# Altium PCB 88路激光器工程_2.PcbDoc
Units mil, origin at the board's own origin, x right, y up, seen from the top; angles counter-clockwise.
Board outline 20074.8 x 3149.61 mil, 2 copper layers (Top Layer, Bottom Layer), stack 35.433 mil thick; 161 components, 179 nets, 582 pads, 139 vias.
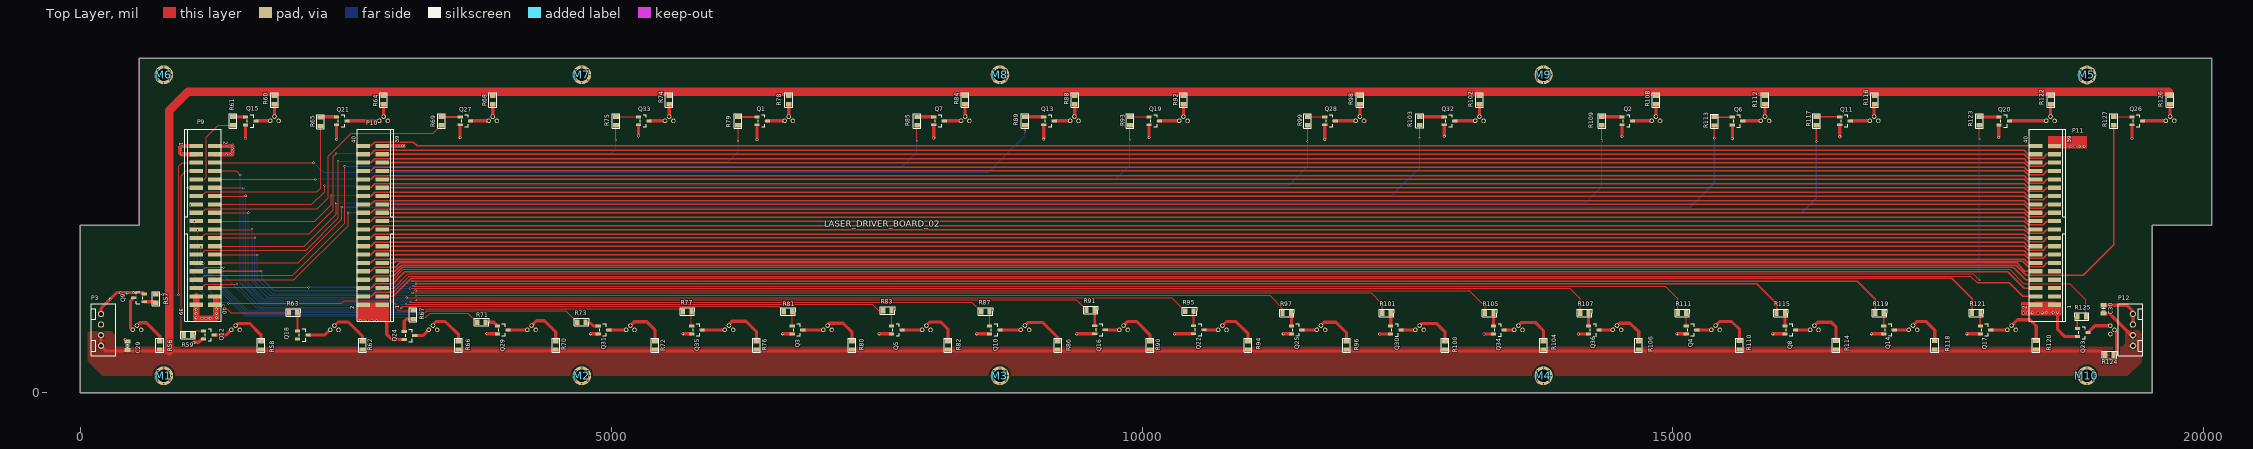
[diagram p0: Top Layer view]
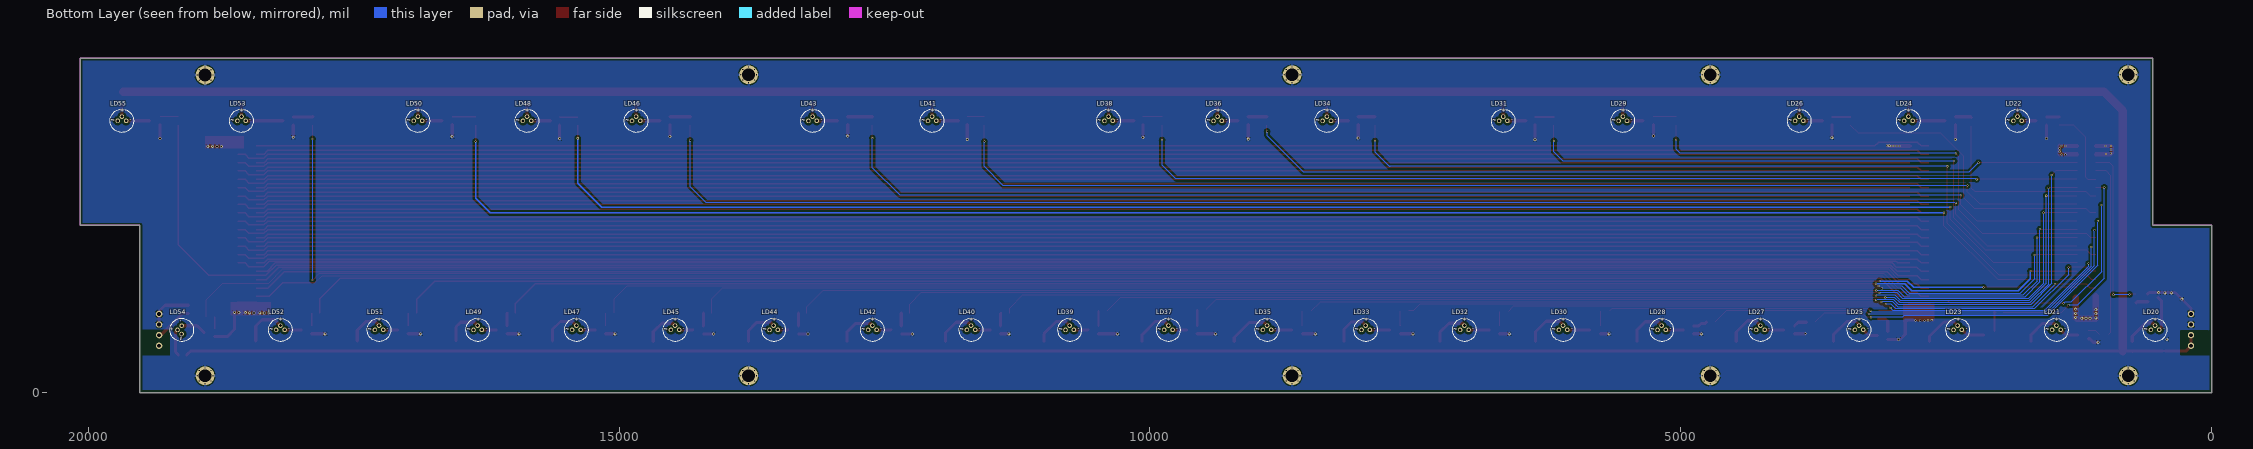
[diagram p1: Bottom Layer view, seen from below]

## Layer stack, top to bottom
Top Solder: solder mask 19.685, Solder Resist, Dk 3.5
Top Layer: signal copper 7.874
Dielectric 1: dielectric 19.685, FR-4, Dk 4.8
Bottom Layer: signal copper 7.874
Bottom Solder: solder mask 7.874, Solder Resist, Dk 3.5

## Board outline
0,0 0,1574.8 555.12,1574.8 555.12,3149.61 20074.8,3149.61 20074.8,1574.8 19511.81,1574.8 19511.81,0

## Design rules (kind name [scope] priority, off if disabled: settings)
Clearance [All] p1: gap=6 ignorepadtopadclearanceinfootprint=FALSE except(20: Arc-Poly Track-Poly SMDPad-Poly THPad-Poly Via-Poly Fill-Poly Poly-Poly)
HoleSize [All] p1: absolutevalues=TRUE maxlimit=200 minlimit=1 maxpercent=80.000 minpercent=20.000
HoleToHoleClearance [All] p1: gap=6 allowstackedmicrovias=TRUE
MinimumSolderMaskSliver [All] p1 off: minsoldermaskwidth=10
PolygonConnect [All] p1: connectstyle=Relief reliefconductorwidth=30 reliefentries=4 polygonreliefangle="90 Angle" airgapwidth=10
RoutingVias [All] p1: holewidth=28 width=50 viastyle="Through Hole" minholewidth=28 minwidth=50 maxholewidth=28 maxwidth=50
SilkToSilkClearance [All] p1 off: silktosilkclearance=10
SilkToSolderMaskClearance [IsPad] p1 off: minsilkscreentomaskgap=10 clearancetoexposedcopper=TRUE
SolderMaskExpansion [All] p1: expansion=4
Width [All] p1: maxlimit=100 minlimit=10 preferedwidth=20 minimp=50.000000 maximp=50.000000 favimp=50.000000
25 further rules are at their usual default settings.

## Components (designator, comment, footprint, x,y, rotation, side; value= is the part's Value field where it differs from the comment)
C29 "10uF/6.3V" C0805 447.83,439.96 r90 top
C30 "10uF/6.3V" C0805 19055.12,783.46 r270 top
LD20 "LD" LD_3P 535.43,590.55 r180 bottom
LD21 "LD" LD_3P 1464.57,590.55 r180 bottom
LD22 "LD" LD_3P 1830.71,2559.06 r180 bottom
LD23 "LD" LD_3P 2393.7,590.55 r180 bottom
LD24 "LD" LD_3P 2858.27,2559.06 r180 bottom
LD25 "LD" LD_3P 3322.83,590.55 r180 bottom
LD26 "LD" LD_3P 3885.83,2559.06 r180 bottom
LD27 "LD" LD_3P 4251.97,590.55 r180 bottom
LD28 "LD" LD_3P 5181.1,590.55 r180 bottom
LD29 "LD" LD_3P 5547.24,2559.06 r180 bottom
LD30 "LD" LD_3P 6110.24,590.55 r180 bottom
LD31 "LD" LD_3P 6673.23,2559.06 r180 bottom
LD32 "LD" LD_3P 7039.37,590.55 r180 bottom
LD33 "LD" LD_3P 7968.5,590.55 r180 bottom
LD34 "LD" LD_3P 8334.65,2559.06 r180 bottom
LD35 "LD" LD_3P 8897.64,590.55 r180 bottom
LD36 "LD" LD_3P 9362.2,2559.06 r180 bottom
LD37 "LD" LD_3P 9826.77,590.55 r180 bottom
LD38 "LD" LD_3P 10389.76,2559.06 r180 bottom
LD39 "LD" LD_3P 10755.91,590.55 r180 bottom
LD40 "LD" LD_3P 11685.04,590.55 r180 bottom
LD41 "LD" LD_3P 12051.18,2559.06 r180 bottom
LD42 "LD" LD_3P 12614.17,590.55 r180 bottom
LD43 "LD" LD_3P 13177.17,2559.06 r180 bottom
LD44 "LD" LD_3P 13543.31,590.55 r180 bottom
LD45 "LD" LD_3P 14472.44,590.55 r180 bottom
LD46 "LD" LD_3P 14838.58,2559.06 r180 bottom
LD47 "LD" LD_3P 15401.57,590.55 r180 bottom
LD48 "LD" LD_3P 15866.14,2559.06 r180 bottom
LD49 "LD" LD_3P 16330.71,590.55 r180 bottom
LD50 "LD" LD_3P 16893.7,2559.06 r180 bottom
LD51 "LD" LD_3P 17259.84,590.55 r180 bottom
LD52 "LD" LD_3P 18188.98,590.55 r180 bottom
LD53 "LD" LD_3P 18555.12,2559.06 r180 bottom
LD54 "LD" LD_3P 19118.11,590.55 r90 bottom
LD55 "LD" LD_3P 19681.1,2559.06 r180 bottom
M1 "HOLE-8STARS" HOLE_3MM 787.4,157.48 r0 top
M2 "HOLE-8STARS" HOLE_3MM 4724.41,157.48 r0 top
M3 "HOLE-8STARS" HOLE_3MM 8661.42,157.48 r0 top
M4 "HOLE-8STARS" HOLE_3MM 13779.53,157.48 r0 top
M5 "HOLE-8STARS" HOLE_3MM 18897.64,2990.79 r0 top
M6 "HOLE-8STARS" HOLE_3MM 787.4,2992.13 r0 top
M7 "HOLE-8STARS" HOLE_3MM 4724.41,2992.13 r0 top
M8 "HOLE-8STARS" HOLE_3MM 8661.42,2992.13 r0 top
M9 "HOLE-8STARS" HOLE_3MM 13779.53,2992.13 r0 top
M10 "HOLE-8STARS" HOLE_3MM 18897.64,157.48 r0 top
P3 "Header 4" XH2.54MM_4P_立式 196.85,590.55 r270 top
P9 "Header 20X2" JATG_2.0MM_2X20P_SMD 1181.1,1574.8 r270 top locked
P10 "Header 20X2" JATG_2.0MM_2X20P_SMD 2755.91,1574.8 r90 top locked
P11 "Header 20X2" JATG_2.0MM_2X20P_SMD 18503.94,1574.8 r90 top locked
P12 "Header 4" XH2.54MM_4P_立式 19330.71,590.55 r90 top
Q1 "NMOS" SOT23-3 6423.23,2559.06 r180 top
Q2 "NMOS" SOT23-3 14568.9,2559.06 r180 top
Q3 "NMOS" SOT23-3 6755,590.55 r180 top
Q4 "NMOS" SOT23-3 15174.21,590.55 r180 top
Q5 "NMOS" SOT23-3 7690,590.55 r180 top
Q6 "NMOS" SOT23-3 15608.27,2558.07 r180 top
Q7 "NMOS" SOT23-3 8088.58,2559.06 r180 top
Q8 "NMOS" SOT23-3 16103.35,590.55 r180 top
Q9 "NMOS" SOT23-3 555.12,892.7 r0 top
Q10 "NMOS" SOT23-3 8614.13,590.55 r180 top
Q11 "NMOS" SOT23-3 16620.08,2559.06 r180 top
Q12 "NMOS" SOT23-3 1211.61,543.31 r180 top
Q13 "NMOS" SOT23-3 9124.02,2559.06 r180 top
Q14 "NMOS" SOT23-3 17033.46,590.55 r180 top
Q15 "NMOS" SOT23-3 1607.28,2558.07 r180 top
Q16 "NMOS" SOT23-3 9604.33,591.54 r180 top
Q17 "NMOS" SOT23-3 17943.9,590.55 r180 top
Q18 "NMOS" SOT23-3 2097.44,542.32 r180 top
Q19 "NMOS" SOT23-3 10116.14,2559.06 r180 top
Q20 "NMOS" SOT23-3 18120.08,2558.07 r180 top
Q21 "NMOS" SOT23-3 2464.57,2559.06 r180 top
Q22 "NMOS" SOT23-3 10534.45,591.54 r180 top
Q23 "NMOS" SOT23-3 18858.27,563.98 r180 top
Q24 "NMOS" SOT23-3 3101.38,537.4 r180 top
Q25 "NMOS" SOT23-3 11455.71,590.55 r180 top
Q26 "NMOS" SOT23-3 19371.06,2559.06 r180 top
Q27 "NMOS" SOT23-3 3627.95,2559.06 r180 top
Q28 "NMOS" SOT23-3 11769.69,2559.06 r180 top
Q29 "NMOS" SOT23-3 3979.33,590.55 r180 top
Q30 "NMOS" SOT23-3 12388.78,589.57 r180 top
Q31 "NMOS" SOT23-3 4928.15,590.55 r180 top
Q32 "NMOS" SOT23-3 12895.67,2559.06 r180 top
Q33 "NMOS" SOT23-3 5308.07,2559.06 r180 top
Q34 "NMOS" SOT23-3 13359.25,589.57 r180 top
Q35 "NMOS" SOT23-3 5808.07,590.55 r180 top
Q36 "NMOS" SOT23-3 14253.94,589.57 r180 top
R56 "200R" R0805 750,443.9 r270 top
R57 "2k" R0805 712.6,884.84 r90 top
R58 "200R" R0805 1702.76,443.9 r270 top
R59 "2k" R0805 1015.75,543.31 r180 top
R60 "200R" R0805 1829.72,2754.92 r90 top
R61 "2k" R0805 1438.98,2557.09 r270 top
R62 "200R" R0805 2660.43,443.9 r270 top
R63 "2k" R0805 2005.91,753.94 r180 top
R64 "200R" R0805 2858.27,2754.92 r90 top
R65 "2k" R0805 2265,2550 r270 top
R66 "200R" R0805 3563.98,443.9 r270 top
R67 "2k" R0805 3136.81,732.28 r90 top
R68 "200R" R0805 3885.83,2754.92 r90 top
R69 "2k" R0805 3404.53,2557.09 r270 top
R70 "200R" R0805 4479.33,443.9 r270 top
R71 "2k" R0805 3778.54,662.4 r180 top
R72 "200R" R0805 5412.4,443.9 r270 top
R73 "2k" R0805 4720.34,662.4 r180 top
R74 "200R" R0805 5547.24,2754.92 r90 top
R75 "2k" R0805 5045.28,2557.09 r270 top
R76 "200R" R0805 6368.11,443.9 r270 top
R77 "2k" R0805 5716.54,763.78 r180 top
R78 "200R" R0805 6673.23,2754.92 r90 top
R79 "2k" R0805 6195.87,2557.09 r270 top
R80 "200R" R0805 7269.69,443.9 r270 top
R81 "2k" R0805 6666.34,761.81 r180 top
R82 "200R" R0805 8173.23,443.9 r270 top
R83 "2k" R0805 7602.36,771.65 r180 top
R84 "200R" R0805 8333.66,2754.92 r90 top
R85 "2k" R0805 7882.87,2556.1 r270 top
R86 "200R" R0805 9206.69,443.9 r270 top
R87 "2k" R0805 8525.59,763.78 r180 top
R88 "200R" R0805 9367.13,2754.92 r90 top
R89 "2k" R0805 8898.62,2556.1 r270 top
R90 "200R" R0805 10073.82,443.9 r270 top
R91 "2k" R0805 9515.75,778.54 r180 top
R92 "200R" R0805 10389.76,2754.92 r90 top
R93 "2k" R0805 9885.83,2557.09 r270 top
R94 "200R" R0805 10999.02,443.9 r270 top
R95 "2k" R0805 10445.87,765.75 r180 top
R96 "200R" R0805 11925.2,443.9 r270 top
R97 "2k" R0805 11362.2,748.03 r180 top
R98 "200R" R0805 12052.17,2754.92 r90 top
R99 "2k" R0805 11560.04,2557.09 r270 top
R100 "200R" R0805 12854.33,443.9 r270 top
R101 "2k" R0805 12302.17,748.03 r180 top
R102 "200R" R0805 13177.17,2754.92 r90 top
R103 "2k" R0805 12615.16,2558.07 r270 top
R104 "200R" R0805 13779.53,443.9 r270 top
R105 "2k" R0805 13270.67,748.03 r180 top
R106 "200R" R0805 14677.17,443.9 r270 top
R107 "2k" R0805 14165.35,748.03 r180 top
R108 "200R" R0805 14840.55,2754.92 r90 top
R109 "2k" R0805 14329.72,2557.09 r270 top
R110 "200R" R0805 15626.97,445.87 r270 top
R111 "2k" R0805 15085.63,748.03 r180 top
R112 "200R" R0805 15865.16,2754.92 r90 top
R113 "2k" R0805 15389.76,2555.12 r270 top
R114 "200R" R0805 16535,445.87 r270 top
R115 "2k" R0805 16014.76,748.03 r180 top
R116 "200R" R0805 16899.61,2754.92 r90 top
R117 "2k" R0805 16350.39,2557.09 r270 top
R118 "200R" R0805 17465,445.87 r270 top
R119 "2k" R0805 16944.88,748.03 r180 top
R120 "200R" R0805 18420,445.87 r270 top
R121 "2k" R0805 17855.31,748.03 r180 top
R122 "200R" R0805 18559.06,2754.92 r90 top
R123 "2k" R0805 17884.84,2557.09 r270 top
R124 "200R" R0805 19110,355 r180 top
R125 "2k" R0805 18848.43,715.55 r0 top
R126 "200R" R0805 19681.1,2754.92 r90 top
R127 "2k" R0805 19150.59,2557.09 r270 top

## Footprints (in the part's own frame and the unit in brackets; to place one, negate y for a bottom-side part, rotate by r counter-clockwise, add the part's x,y. Pads: shape width x height; smd on the part's side, far side on the other; paste and mask are expansions set on the pad)
C0805 [mm]
  rect 1x1.4 smd: 1(-1.003,0) 2(1.003,0)
  silkscreen extent -0.43,-0.43 0.43,0.45, body extent -1.21,-0.62 1.14,0.67, height 0.5
HOLE_3MM [mm]
  round 0.5 hole 0.3: 1(0,1.9) 2(-1.4,1.25) 3(-1.9,0) 4(-1.4,-1.25) 5(0,-1.9) 6(1.4,-1.25) 7(1.9,0) 8(1.4,1.25)
  round 4.5 hole 3.05: 9(0,0)
JATG_2.0MM_2X20P_SMD [mm]
  rect 1x3.2 smd: 1(-19,-2.25) 2(-19,2.25) 3(-17,-2.25) 4(-17,2.25) 5(-15,-2.25) 6(-15,2.25) 7(-13,-2.25) 8(-13,2.25) 9(-11,-2.25) 10(-11,2.25) 11(-9,-2.25) 12(-9,2.25) 13(-7,-2.25) 14(-7,2.25) 15(-5,-2.25) 16(-5,2.25) 17(-3,-2.25) 18(-3,2.25) 19(-1,-2.25) 20(-1,2.25) 21(1,-2.25) 22(1,2.25) 23(3,-2.25) 24(3,2.25) 25(5,-2.25) 26(5,2.25) 27(7,-2.25) 28(7,2.25) 29(9,-2.25) 30(9,2.25) 31(11,-2.25) 32(11,2.25) 33(13,-2.25) 34(13,2.25) 35(15,-2.25) 36(15,2.25) 37(17,-2.25) 38(17,2.25) 39(19,-2.25) 40(19,2.25)
  silkscreen extent -23,-5 23,3.75, body extent -22.99,-4.25 23,3.8, height 6.9
LD_3P [mm]
  round 1.1 hole 0.7: 1(0,1) ""(-1,0)
  round 1.1 hole 0.6: 2(1,0)
  silkscreen extent -2.81,-2.8 2.79,2.8, body extent -3,-3 3,3, height 5
R0805 [mm]
  rect 1x1.4 smd: 1(-1.003,0) 2(1.003,0)
  silkscreen extent -1.71,-0.9 1.69,0.9, body extent -1.21,-0.62 1.14,0.67, height 0.5
SOT23-3 [mm]
  rect 1.25x0.7 smd: 1(1.25,-0.95) 2(1.25,0.95) 3(-1.25,0)
  silkscreen extent -0.65,-1.46 0.9,1.46
XH2.54MM_4P_立式 [mil]
  round 60 hole 35.43: 1(-150,0) 2(-50,0) 3(50,0) 4(150,0)
  silkscreen extent -246,-91 246,138, body extent -246,-91 246,138, height 272

## Part data
C29 C30: library part C
P3 P12: "Header, 4-Pin", LatestRevisionDate=17-Jul-2002, LatestRevisionNote="Re-released for DXP Platform.", Publisher="Altium Limited"
P9 P10 P11: "Header, 20-Pin, Dual row", LatestRevisionDate=17-Jul-2002, LatestRevisionNote="Re-released for DXP Platform.", Publisher="Altium Limited"
R56 R57 R58 R59 R60 R61 R62 R63 R64 R65 R66 R67 R68 R69 R70 R71 R72 R73 R74 R75 R76 R77 R78 R79 R80 R81 R82 R83 R84 R85 R86 R87 R88 R89 R90 R91 R92 R93 R94 R95 R96 R97 R98 R99 R100 R101 R102 R103 R104 R105 R106 R107 R108 R109 R110 R111 R112 R113 R114 R115 R116 R117 R118 R119 R120 R121 R122 R123 R124 R125 R126 R127: library part Res2, "Resistor", LatestRevisionDate=17-Jul-2002, LatestRevisionNote="Re-released for DXP Platform.", PackageDescription="Axial Device, Thru-Hole; 2 Leads; 0.4 in Pin Spacing", PackageReference=AXIAL-0.4, Published=8-Jun-2000, Publisher="Altium Limited"

## Via types
v1: diameter 19.68, hole 11.81, Top Layer to Bottom Layer, tented both sides, 81 vias
v2: diameter 27.56, hole 15.75, Top Layer to Bottom Layer, tented both sides, 58 vias

## Nets (pads, with @x,y where several pads share a name; then routed paths per layer and width w, separated by ;. In a path a pad name is that pad's centre, name@x,y a point inside that pad or via, vN(x,y) a via of type N, cw(c..) or ccw(c..) an arc to the next point about the centre after c; other vN are vias at no path point)
GND: C29.2 C30.1 M1.1 M1.2 M1.3 M1.4 M1.5 M1.6 M1.7 M1.8 M1.9 M2.1 M2.2 M2.3 M2.4 M2.5 M2.6 M2.7 M2.8 M2.9 M3.1 M3.2 M3.3 M3.4 M3.5 M3.6 M3.7 M3.8 M3.9 M4.1 M4.2 M4.3 M4.4 M4.5 M4.6 M4.7 M4.8 M4.9 M5.1 M5.2 M5.3 M5.4 M5.5 M5.6 M5.7 M5.8 M5.9 M6.1 M6.2 M6.3 M6.4 M6.5 M6.6 M6.7 M6.8 M6.9 M7.1 M7.2 M7.3 M7.4 M7.5 M7.6 M7.7 M7.8 M7.9 M8.1 M8.2 M8.3 M8.4 M8.5 M8.6 M8.7 M8.8 M8.9 M9.1 M9.2 M9.3 M9.4 M9.5 M9.6 M9.7 M9.8 M9.9 M10.1 M10.2 M10.3 M10.4 M10.5 M10.6 M10.7 M10.8 M10.9 P3.1 P3.2 P9.1 P9.2 P9.3 P9.4 P9.37 P9.38 P9.39 P9.40 P10.1 P10.2 P10.39 P11.1 P11.2 P11.39 P12.3 P12.4 Q1.2 Q2.2 Q3.2 Q4.2 Q5.2 Q6.2 Q7.2 Q8.2 Q9.2 Q10.2 Q11.2 Q12.2 Q13.2 Q14.2 Q15.2 Q16.2 Q17.2 Q19.2 Q20.2 Q21.2 Q22.2 Q23.2 Q24.2 Q25.2 Q26.2 Q27.2 Q28.2 Q29.2 Q30.2 Q31.2 Q32.2 Q33.2 Q34.2 Q35.2 Q36.2 | length 7513.3
  Top Layer w30: P3.1 196.85,792.32 346.43,941.9 592.52,941.9 Q9.2 ; v2@1067.91,473.43 1116.14,473.43 1148.62,505.91 Q12.2 ; v2(1558.08,2392.73) Q15.2 ; v2(2415.37,2382.86) Q21.2 ; 2886.81,725.39 2886.81,670.28 2886.81,548.23 2935.04,500 Q24.2 ; v2(3578.75,2399.59) Q27.2 ; v1@3829.72,553.15 Q29.2 ; v2(4808.07,553.15) Q31.2 ; v2(5258.87,2416.35) Q33.2 ; v2(5676.18,553.15) Q35.2 ; v2(6374.02,2380.91) Q1.2 ; v2(6616.14,553.15) Q3.2 ; v2(7523.62,553.15) Q5.2 ; v2(8039.38,2396.67) Q7.2 ; v2(8442.91,553.15) Q10.2 ; v2(9074.82,2386.82) Q13.2 ; v2(9382.88,553.15) 9383.86,554.14 Q16.2 ; v2(10066.94,2402.55) Q19.2 ; v2(10305.12,553.15) 10484.26,553.15 Q22.2 ; v2(11328.74,553.15) Q25.2 ; v2(11720.49,2382.89) Q28.2 ; v2(12237.2,551.18) 12238.19,552.17 Q30.2 ; v2(12846.47,2414.38) Q32.2 ; v2(13220.47,552.17) Q34.2 ; v2(14108.27,552.17) Q36.2 ; v2@14519.7,2410.45 Q2.2 ; v2(15036.42,553.15) Q4.2 ; Q6.2 v2(15559.07,2391.72) v2@15560.04,2390.75 ; v2(15939.96,553.15) Q8.2 ; v2@16570.88,2409.46 Q11.2 ; v2(16868.11,553.15) Q14.2 ; v2(17766.73,553.15) Q17.2 ; v2(18067.91,2404.53) 18067.91,2517.71 Q20.2 ; v2(18621.06,754.92) 18621.06,595.47 18689.96,526.58 Q23.2 ; C30.1 19275.46,822.96 19330.71,767.72 P12.4 P12.3 ; v2(19321.86,2392.7) Q26.2
  Top Layer w40: P9.3 953.74,2244.09 940.94,2256.89 940.94,2312.99 v1(950.79,2322.83) P9.1 ; P9.4 1433.07,2244.09 1435.04,2246.06 1435.04,2323.82 1434.06,2322.83 P9.2 ; P10.2 P10.1 2844.49,712.6 2886.81,670.28 ; P10.39 3051.18,2322.83
  Top Layer w60: P9.37 P9.39 1092.52,693.9 1271.65,693.9 1280.51,702.76 P9.38@1280.51,891.73 ; P11.2 P11.1
  other v1: 3828.74,556.1 2791.34,678.59 2747.05,679.13 2706.69,680.12 2673.23,681.1 2637.8,682.09 1378.94,2240.16 1414.37,2240.16 998.03,2246.06 951.77,2252.95 1433.07,2268.7 949.8,2288.39 1433.07,2298.23 1414.37,2320.87 1001.97,2322.83 1378.94,2322.83 2942.91,2322.83 2968.5,2322.83 2992.13,2322.83 3016.73,2322.83 3038.39,2323.82 3061.02,2324.8
  other v2: 1070.87,473.43 2950.79,500 424.21,500.98 1147.64,699.8 1185.04,699.8 1224.41,699.8 1092.52,703.74 1282.48,708.66 1092.52,743.11 1282.48,746.06 18300.2,749.02 18341.54,750 18437.01,750 18381.89,750.98 18478.35,750.98 18518.7,751.97 18579.72,753.94 1092.52,780.51 1282.48,785.43 283.46,879.92 381.89,938.98 442.91,938.98 501.97,940.94 18745.08,2316.93 18786.42,2317.91 18826.77,2318.9 18872.05,2318.9 16570.87,2409.45 14521.65,2411.42
LD20: P9.5 R57.2 | length 1604
  Top Layer w10: R57.2 v1(775.46,924.34) ; v1(927.17,921.26) 928.15,922.24 928.15,2129.92 963.58,2165.35 P9.5
  Bottom Layer w10: v1(775.46,924.34) 778.54,921.26 v1(927.17,921.26)
LD21: P9.7 R59.2 | length 1669
  Top Layer w10: R59.2 951.56,567.99 951.56,2043.1 995.08,2086.61 P9.7
LD22: P9.9 R61.2 | length 780.6
  Top Layer w10: P9.9 1096.46,2003.94 1164.37,2003.94 1188.98,2028.54 1188.98,2403.72 1302.85,2517.59 R61.2
LD23: P9.11 R63.2 | length 2019.5
  Top Layer w10: v1(1013.78,1931.1) 1015.75,1929.13 P9.11 ; v1(1349.48,822.77) 1418.31,753.94 R63.2@1964.57,753.94
  Bottom Layer w10: v1(1013.78,1931.1) 1013.78,1074.8 1265.81,822.77 v1(1349.48,822.77)
LD24: P9.13 R65.2 | length 1788.9
  Top Layer w10: P9.13 1142.72,1850.39 1181.1,1888.78 2228.78,1888.78 2265,1925 R65.2
LD25: P9.15 R67.2 | length 2915.4
  Top Layer w10: v1@1396.65,840.55 2462.6,840.55 2486.22,864.17 2936.02,864.17 2975.39,824.8 2975.39,795.41 2999.02,771.78 R67.2
  Bottom Layer w10: v1(1039.37,1766.73) 1039.37,1139.76 1330.71,848.43 1387.8,848.43 v1(1397.64,838.58)
LD26: P9.17 R69.2 | length 2883.1
  Top Layer w10: P9.17 1144.68,1692.91 1183.07,1731.3 2234.25,1731.3 2338.58,1835.63 2338.58,2227.36 2551.05,2439.83 3326.77,2439.83 R69.2
LD27: P9.19 R71.2 | length 3334.2
  Top Layer w10: v1(3209.65,709.65) 3255.91,709.65 3295.28,749.02 3652.43,749.02 R71.2
  Bottom Layer w10: v1(1073.82,1614.17) 1073.82,1200.79 1551.43,723.17 2900.59,723.17 2914.12,709.65 v1(3209.65,709.65)
LD28: P9.21 R73.2 | length 4156.1
  Top Layer w10: v1(3230.32,739.17) 3262.17,771.02 4572.22,771.02 R73.2
  Bottom Layer w10: v1(1106.3,1529.53) 1106.3,1194.88 1562.01,739.17 v1(3230.32,739.17)
LD29: P9.23 R75.2 | length 4818.2
  Top Layer w10: P9.23 1139.76,1456.69 1177.17,1494.09 2155.51,1494.09 2384.84,1723.43 2384.84,2225.39 v1(2410.43,2250.98) ; v1(5045.28,2377.95) R75.2
  Bottom Layer w10: v1(2410.43,2250.98) 2412.4,2252.95 5005.91,2252.95 5045.28,2292.32 v1(5045.28,2377.95)
LD30: P9.25 R77.2 | length 4928.7
  Top Layer w10: v1(3216.54,769.68) 3237.87,791.02 5649.79,791.02 R77.2
  Bottom Layer w10: v1(1135.83,1370.08) 1135.83,1187.98 1568.64,755.17 3202.02,755.17 v1(3216.54,769.68)
LD31: P9.27 R79.2 | length 6076.8
  Top Layer w10: P9.27 1137.8,1299.21 1179.13,1340.55 2127.95,1340.55 2433.24,1645.84 2433.24,2174.04 v1(2428.15,2179.13) ; v1(6195.87,2370.08) R79.2
  Bottom Layer w10: v1(2428.15,2179.13) 2430.12,2177.17 6107.28,2177.17 6195.87,2265.75 v1(6195.87,2370.08)
LD32: P9.29 R81.2 | length 5701
  Top Layer w10: v1(3024.61,795.28) 3040.35,811.02 3219.17,811.02 3219.17,811.19 3219.34,811.02 6577.63,811.02 R81.2
  Bottom Layer w10: v1(1160.43,1214.57) 1160.43,1190.94 1580.2,771.17 3000.5,771.17 v1(3024.61,795.28)
LD33: P9.31 R83.2 | length 6735.5
  Top Layer w10: P9.31 1139.76,1141.73 1177.17,1179.13 v1(1351.38,1179.13) ; v1(3068.9,832.68) 3069.84,831.73 3100.41,831.73 3101.25,830.89 3118.52,830.89 3119.36,831.73 7461.61,831.73 7521.69,771.65 R83.2
  Bottom Layer w10: v1(1351.38,1179.13) 1349.48,1177.23 1349.48,1111.15 1673.46,787.17 2975.17,787.17 3020.67,832.68 v1(3068.9,832.68)
LD34: P9.33 R85.2 | length 7856.9
  Top Layer w10: P9.33 1131.89,1062.99 1172.24,1103.35 2001.97,1103.35 2492.13,1593.5 2492.13,2129.92 v1(2491.14,2130.91) ; v1(7880.91,2367.13) 7880.91,2514.63 R85.2
  Bottom Layer w10: v1(2491.14,2130.91) 7740.16,2130.91 7743.11,2127.95 7879.92,2264.76 7879.92,2366.14 v1(7880.91,2367.13)
LD35: P9.35 R87.2 | length 7558.3
  Top Layer w10: P9.35 1143.7,984.25 1180.12,1020.67 v1(1477.36,1020.67) v1@1477.36,1019.68 ; v1(3109.88,851.73) 8398.14,851.73 R87.2
  Bottom Layer w10: v1(1477.36,1020.67) 1477.36,1019.69 1693.87,803.17 2953.76,803.17 3004.11,853.52 3108.09,853.52 v1(3109.88,851.73)
LD36: P9.6 R89.2 | length 7907.8
  Top Layer w10: P9.6 2197.83,2165.35 v1(2198.82,2164.37) ; v1(8896.65,2458.66) 8898.62,2460.63 R89.2@8898.62,2518.57
  Bottom Layer w10: v1(2198.82,2164.37) 2288.39,2074.8 8553.15,2074.8 8896.65,2418.31 v1(8896.65,2458.66)
LD37: P9.8 R91.2 | length 9384
  Top Layer w10: P9.8 1469.49,2086.61 v1(1507.87,2048.23) ; v1(3161.57,873.07) 9381.72,873.07 R91.2
  Bottom Layer w10: v1(1507.87,2048.23) 1507.87,1027.56 1707.93,827.5 2948.57,827.5 2993.64,872.57 3161.07,872.57 v1(3161.57,873.07)
LD38: P9.10 R93.2 | length 9046.9
  Top Layer w10: P9.10 v1(2214.57,2007.87) ; v1(9885.83,2376.97) R93.2
  Bottom Layer w10: v1(2214.57,2007.87) 2218.5,2011.81 9754.92,2011.81 9885.83,2142.72 v1(9885.83,2376.97)
LD39: P9.12 R95.2 | length 10190.8
  Top Layer w10: P9.12 1536.42,1929.13 v1(1537.89,1927.66) ; v1(3075.79,893.7) 3076,893.92 10278.2,893.92 R95.2
  Bottom Layer w10: v1(1537.89,1927.66) 1538.39,1927.17 1538.39,1021.65 1716.54,843.5 2937.01,843.5 2987.2,893.7 v1(3075.79,893.7)
LD40: P9.14 R97.2 | length 11064.2
  Top Layer w10: P9.14 1557.09,1850.39 v1(1560.04,1853.35) ; v1(3162.4,915.35) 11200.79,915.35 11322.7,793.44 R97.2
  Bottom Layer w10: v1(1560.04,1853.35) 1560.04,1028.54 1724.41,864.17 2930.12,864.17 2981.3,915.35 v1(3162.4,915.35)
LD41: P9.16 R99.2 | length 10939.2
  Top Layer w10: P9.16 2183.31,1771.65 2303.15,1891.5 v1(2303.15,1949.8) ; v1(11560,2363.15) 11560,2438.94 ; 11560,2438.94 R99.2 R99.2 11560.04,2438.98 11560,2438.94
  Bottom Layer w10: v1(2303.15,1949.8) 11379.88,1949.8 11560,2129.92 v1(11560,2363.15)
LD42: P9.18 R101.2 | length 11867.5
  Top Layer w10: P9.18 v1(1584.65,1692.91) ; v1(3129.92,937.99) 12156.5,937.99 12262.67,831.82 R101.2
  Bottom Layer w10: v1(1584.65,1692.91) 1584.65,1028.54 1729.33,883.86 2909.45,883.86 2963.58,937.99 v1(3129.92,937.99)
LD43: P9.20 R103.2 | length 12004.8
  Top Layer w10: P9.20 2208.66,1614.17 2363.19,1768.7 v1(2363.19,1854.33) ; v1(12614.17,2395.67) 12615,2396.5 12615,2518.41 R103.2
  Bottom Layer w10: v1(2363.19,1854.33) 2365.16,1856.3 12353.35,1856.3 12614.17,2117.13 v1(12614.17,2395.67)
LD44: P9.22 R105.2 | length 12663.9
  Top Layer w10: P9.22 v1@1619.09,1535.43 ; v1(3160.43,959.65) 13076.44,959.65 13078.09,961.3 13231.17,808.22 R105.2
  Bottom Layer w10: v1(1619.09,1538.39) 1619.09,1045.28 1764.51,899.86 2892.97,899.86 2952.58,959.47 3160.26,959.47 v1(3160.43,959.65)
LD45: P9.24 R107.2 | length 13523.2
  Top Layer w10: P9.24 v1@1646.65,1456.69 ; v1(3108.27,980.31) 3108.44,980.49 3169.07,980.49 3169.24,980.31 14026.57,980.31 14027.56,981.3 14125.85,883 R107.2
  Bottom Layer w10: v1(1647.64,1457.68) 1646.65,1456.69 1646.65,1049.21 1780.01,915.86 2863.69,915.86 2928.15,980.31 v1(3108.27,980.31)
LD46: P9.26 R109.2 | length 13938.6
  Top Layer w10: P9.26 2110.24,1377.95 2411.42,1679.13 v1(2411.42,1786.42) ; R109.2 14330,2517.31 v1(14330,2373.31)
  Bottom Layer w10: v1@2406.5,1787.4 v1@2411.42,1787.4 ; v1(2411.42,1786.42) 2412.4,1787.4 14177.44,1787.4 14330,1939.96 v1(14330,2373.31)
LD47: P9.28 R111.2 | length 14271.4
  Top Layer w10: P9.28 v1@1669.29,1299.21 ; v1(3138.78,1002.95) 14925.92,1002.95 15046.13,882.74 R111.2
  Bottom Layer w10: v1(1670.28,1296.26) 1670.28,1072.58 1811,931.86 2844.26,931.86 2915.35,1002.95 v1(3138.78,1002.95)
LD48: P9.30 R113.2 | length 15041.8
  Top Layer w10: P9.30 2052.17,1220.47 2463.58,1631.89 v1(2463.58,1747.05)
  Top Layer w12: v1(15388.78,2394.69) 15390,2395.91 15390,2515.38 R113.2
  Bottom Layer w12: v1(2463.58,1747.05) 15163.39,1747.05 15388.78,1972.44 v1(15388.78,2394.69)
LD49: P9.32 R115.2 | length 15016.2
  Top Layer w12: P9.32 v1@1708.66,1141.73 ; v1(3162.4,1024.61) 15787.4,1024.61 15975.26,836.74 R115.2
  Bottom Layer w12: v1(1709.65,1143.7) 1709.65,1073.82 1824.8,958.66 2826.77,958.66 2892.91,1024.8 3162.21,1024.8 v1(3162.4,1024.61)
LD50: P9.34 R117.2 | length 16158.8
  Top Layer w10: P9.34 2013.78,1062.99 2523.62,1572.83 v1(2523.62,1692.91)
  Top Layer w12: v1(16350.39,2364.17) 16350,2364.57 16350,2517.19 R117.2
  Bottom Layer w12: v1(2523.62,1692.91) 2524.61,1691.93 16214.57,1691.93 16350.39,1827.76 v1(16350.39,2364.17)
LD51: P9.36 R119.2 | length 15865
  Top Layer w10: P9.36 1275.59,990.16 v1(2151.57,990.16)
  Top Layer w12: v1(3132.04,1050.25) 16734.2,1050.25 16905.38,879.07 R119.2
  Bottom Layer w12: v1(2151.57,990.16) 2809.06,990.16 2869.15,1050.25 v1(3132.04,1050.25)
LD52: P10.3 R121.2 | length 15258.1
  Top Layer w12: P10.3 2947.83,905.51 3118.41,1076.09 17624.7,1076.09 17815.81,884.97 R121.2
LD53: P10.5 R123.2 | length 16577.9
  Top Layer w10: P10.5 2952.76,984.25 3085.59,1117.09 17826.81,1117.09 v1(17884.84,1059.06) ; v1(17884.84,2388.78) R123.2
  Bottom Layer w10: v1(17884.84,1059.06) v1(17884.84,2388.78)
LD54: P10.7 R125.2 | length 16359.1
  Top Layer w10: P10.7 2948.82,1062.99 3044.92,1159.09 18169.65,1159.09 18303.15,1025.59 18735.24,1025.59 18887.93,872.9 R125.2
LD55: P10.9 R127.2 | length 17618.8
  Top Layer w12: P10.9 2964.57,1141.73 3023.62,1200.79 18228.76,1200.79 18326.2,1103.35 18865.16,1103.35 19151.57,1389.76 19151.57,2516.6 R127.2
LD56: P10.11 P11.11 | length 15792.2
  Top Layer w12: P10.11 2958.66,1220.47 2976.35,1238.16 18292.36,1238.16 18345.73,1184.79 18484.97,1184.79 18520.66,1220.47 P11.11
LD57: P10.13 P11.13 | length 15777.6
  Top Layer w12: P10.13 18310.05,1299.21 18345.73,1263.53 18484.97,1263.53 18520.66,1299.21 P11.13
LD58: P10.15 P11.15 | length 15777.6
  Top Layer w12: P10.15 18310.05,1377.95 18345.73,1342.27 18484.97,1342.27 18520.66,1377.95 P11.15
LD59: P10.17 P11.17 | length 15777.6
  Top Layer w12: P10.17 18310.05,1456.69 18345.73,1421.01 18484.97,1421.01 18520.66,1456.69 P11.17
LD60: P10.19 P11.19 | length 15777.6
  Top Layer w12: P10.19 18310.05,1535.43 18345.73,1499.75 18484.97,1499.75 18520.66,1535.43 P11.19
LD61: P10.21 P11.21 | length 15777.6
  Top Layer w12: P10.21 18310.05,1614.17 18345.73,1578.49 18484.97,1578.49 18520.66,1614.17 P11.21
LD62: P10.23 P11.23 | length 15777.6
  Top Layer w12: P10.23 18310.05,1692.91 18345.73,1657.23 18484.97,1657.23 18520.66,1692.91 P11.23
LD63: P10.25 P11.25 | length 15777.6
  Top Layer w12: P10.25 18310.05,1771.65 18345.73,1735.97 18484.97,1735.97 18520.66,1771.65 P11.25
LD64: P10.27 P11.27 | length 15777.6
  Top Layer w12: P10.27 18310.05,1850.39 18345.73,1814.71 18484.97,1814.71 18520.66,1850.39 P11.27
LD65: P10.29 P11.29 | length 15777.6
  Top Layer w12: P10.29 18310.05,1929.13 18345.73,1893.45 18484.97,1893.45 18520.66,1929.13 P11.29
LD66: P10.31 P11.31 | length 15777.6
  Top Layer w12: P10.31 18310.05,2007.87 18345.73,1972.19 18484.97,1972.19 18520.66,2007.87 P11.31
LD67: P10.33 P11.33 | length 15777.6
  Top Layer w12: P10.33 18310.05,2086.61 18345.73,2050.93 18484.97,2050.93 18520.66,2086.61 P11.33
LD68: P10.35 P11.35 | length 15777.6
  Top Layer w12: P10.35 18310.05,2165.35 18345.73,2129.67 18484.97,2129.67 18520.66,2165.35 P11.35
LD69: P10.37 P11.37 | length 15777.6
  Top Layer w12: P10.37 18310.05,2244.09 18345.73,2208.41 18484.97,2208.41 18520.66,2244.09 P11.37
LD70: P10.4 P11.4 | length 15907.5
  Top Layer w10: 2950.79,946.85 3101.03,1097.09 17798.58,1097.09 17863.19,1032.48
  Top Layer w12: P10.4 2740.51,905.51 2765.5,930.5 2765.5,931.82 2780.52,946.85 2950.79,946.85 ; 17863.19,1032.48 18168.72,1032.48 18295.69,905.51 P11.4
LD71: P10.6 P11.6 | length 15875.5
  Top Layer w12: P10.6 2739.25,984.25 2765.5,1010.5 2765.5,1010.56 2779.54,1024.61 2943.9,1024.61 3057.38,1138.09 18151.91,1138.09 18305.75,984.25 P11.6
LD72: P10.8 P11.8 | length 15845
  Top Layer w12: P10.8 2739.18,1062.99 2776.19,1100 2952.36,1100 3032.45,1180.09 18204.91,1180.09 18322.01,1062.99 P11.8
LD73: P10.10 P11.10 | length 15813
  Top Layer w12: P10.10 2739.18,1141.73 2777.51,1180.06 2970.41,1180.06 3010.51,1220.16 18234.84,1220.16 18313.27,1141.73 P11.10
LD74: P10.12 P11.12 | length 15777.6
  Top Layer w12: P10.12 2739.18,1220.47 2774.87,1256.16 18305.48,1256.16 18341.16,1220.47 P11.12
LD75: P10.14 P11.14 | length 15777.6
  Top Layer w12: P10.14 2739.18,1299.21 2774.87,1334.9 18305.48,1334.9 18341.16,1299.21 P11.14
LD76: P10.16 P11.16 | length 15777.6
  Top Layer w12: P10.16 2739.18,1377.95 2774.87,1413.64 18305.48,1413.64 18341.16,1377.95 P11.16
LD77: P10.18 P11.18 | length 15777.6
  Top Layer w12: P10.18 2739.18,1456.69 2774.87,1492.38 18305.48,1492.38 18341.16,1456.69 P11.18
LD78: P10.20 P11.20 | length 15777.6
  Top Layer w12: P10.20 2739.18,1535.43 2774.87,1571.12 18305.48,1571.12 18341.16,1535.43 P11.20
LD79: P10.22 P11.22 | length 15777.6
  Top Layer w12: P10.22 2739.18,1614.17 2774.87,1649.86 18305.48,1649.86 18341.16,1614.17 P11.22
LD80: P10.24 P11.24 | length 15777.6
  Top Layer w12: P10.24 2739.18,1692.91 2774.87,1728.6 18305.48,1728.6 18341.16,1692.91 P11.24
LD81: P10.26 P11.26 | length 15777.6
  Top Layer w12: P10.26 2739.18,1771.65 2774.87,1807.34 18305.48,1807.34 18341.16,1771.65 P11.26
LD82: P10.28 P11.28 | length 15777.6
  Top Layer w12: P10.28 2739.18,1850.39 2774.87,1886.08 18305.48,1886.08 18341.16,1850.39 P11.28
LD83: P10.30 P11.30 | length 15777.6
  Top Layer w12: P10.30 2739.18,1929.13 2774.87,1964.82 18305.48,1964.82 18341.16,1929.13 P11.30
LD84: P10.32 P11.32 | length 15777.6
  Top Layer w12: P10.32 2739.18,2007.87 2774.87,2043.56 18305.48,2043.56 18341.16,2007.87 P11.32
LD85: P10.34 P11.34 | length 15777.6
  Top Layer w12: P10.34 2739.18,2086.61 2774.87,2122.3 18305.48,2122.3 18341.16,2086.61 P11.34
LD86: P10.36 P11.36 | length 15777.6
  Top Layer w12: P10.36 2739.18,2165.35 2774.87,2201.04 18305.48,2201.04 18341.16,2165.35 P11.36
LD87: P10.38 P11.38 | length 15777.6
  Top Layer w12: P10.38 2739.18,2244.09 2774.87,2279.78 18305.48,2279.78 18341.16,2244.09 P11.38
LD88: P10.40 P11.40 | length 15777.6
  Top Layer w12: P10.40 2739.18,2322.83 2774.87,2358.52 3139.51,2358.52 3175.2,2322.83 P11.40
NetLD20_1: LD20.1 R56.1 | length 326.3
  Top Layer w30: LD20.1 562.99,657.48 624.02,657.48 750,531.5 R56.1
NetLD20_2: LD20.2 Q9.3 | length 324.7
  Top Layer w30: LD20.2@495.43,590.55 473.43,612.56 473.43,860.21 Q9.3
NetLD21_1: LD21.1 R58.1 | length 352.8
  Top Layer w30: LD21.1 1485.24,650.59 1598.43,650.59 1702.76,546.26 R58.1
NetLD21_2: LD21.2 Q12.3 | length 183.7
  Top Layer w30: Q12.3@1260.81,542.31 1376.33,542.31 LD21.2@1424.57,590.55
NetLD22_1: LD22.1 R60.1 | length 117.4
  Top Layer w30: R60.1 1830.71,2714.44 LD22.1
NetLD22_2: LD22.2 Q15.3 | length 134.9
  Top Layer w30: Q15.3@1656.48,2559.06 LD22.2
NetLD23_1: LD23.1 R62.1 | length 381.8
  Top Layer w30: LD23.1 2428.15,664.37 2523.62,664.37 2660.43,527.56 R62.1
NetLD23_2: LD23.2 Q18.3 | length 227
  Top Layer w30: Q18.3 2305.47,542.32 LD23.2@2353.7,590.55
NetLD24_1: LD24.1 R64.1 | length 117
  Top Layer w30: LD24.1 R64.1
NetLD24_2: LD24.2 Q21.3 | length 304.1
  Top Layer w30: Q21.3@2514.75,2559.06 LD24.2
NetLD25_1: LD25.1 R66.1 | length 376.5
  Top Layer w30: LD25.1 3322.83,640.75 3351.38,669.29 3438.98,669.29 3563.98,544.29 R66.1
NetLD25_2: LD25.2 Q24.3 | length 154.3
  Top Layer w30: Q24.3 3229.68,537.4 LD25.2@3282.83,590.55
NetLD26_1: LD26.1 R68.1 | length 117
  Top Layer w30: LD26.1 R68.1
NetLD26_2: LD26.2 Q27.3 | length 178.6
  Top Layer w30: Q27.3@3667.87,2559.06 LD26.2
NetLD27_1: LD27.1 R70.1 | length 377.7
  Top Layer w30: LD27.1@4251.34,629.92 4297.6,676.18 4373.03,676.18 4479.33,569.88 R70.1
NetLD27_2: LD27.2 Q29.3 | length 183.4
  Top Layer w30: Q29.3 LD27.2@4211.97,590.55
NetLD28_1: LD28.1 R72.1 | length 387
  Top Layer w30: LD28.1@5180.47,629.92 5217.87,667.32 5336.61,667.32 5412.4,591.54 R72.1
NetLD28_2: LD28.2 Q31.3 | length 164.4
  Top Layer w30: Q31.3 LD28.2
NetLD29_1: LD29.1 R74.1 | length 117
  Top Layer w30: LD29.1 R74.1
NetLD29_2: LD29.2 Q33.3 | length 150.6
  Top Layer w30: Q33.3 LD29.2
NetLD30_1: LD30.1 R76.1 | length 413.8
  Top Layer w30: LD30.1@6109.61,629.92 6109.61,640.12 6141.73,672.24 6270.67,672.24 6368.11,574.8 R76.1
NetLD30_2: LD30.2 Q35.3 | length 213.6
  Top Layer w30: Q35.3 LD30.2
NetLD31_1: LD31.1 R78.1 | length 117
  Top Layer w30: LD31.1 R78.1
NetLD31_2: LD31.2 Q1.3 | length 173.7
  Top Layer w30: Q1.3@6460.19,2559.06 LD31.2
NetLD32_1: LD32.1 R80.1 | length 363.6
  Top Layer w30: LD32.1@7038.74,629.92 7038.74,637.17 7054.13,652.56 7184.05,652.56 7269.69,566.93 R80.1
NetLD32_2: LD32.2 Q3.3 | length 195.8
  Top Layer w30: Q3.3 LD32.2
NetLD33_1: LD33.1 R82.1 | length 360.2
  Top Layer w30: LD33.1@7967.87,629.92 8002.32,664.37 8104.33,664.37 8173.23,595.47 R82.1
NetLD33_2: LD33.2 Q5.3 | length 189.9
  Top Layer w30: Q5.3 LD33.2
NetLD34_1: LD34.1 R84.1 | length 117.4
  Top Layer w30: R84.1 8333.66,2599.41 LD34.1
NetLD34_2: LD34.2 Q7.3 | length 165.4
  Top Layer w30: Q7.3@8129.92,2559.06 Q7.3 LD34.2
NetLD35_1: LD35.1 R86.1 | length 416.3
  Top Layer w30: LD35.1@8897.01,629.92 8897.01,631.24 8925.22,659.45 9065.94,659.45 9206.69,518.7 R86.1
NetLD35_2: LD35.2 Q10.3 | length 194.9
  Top Layer w30: Q10.3 LD35.2
NetLD36_1: LD36.1 R88.1 | length 119
  Top Layer w30: LD36.1 9367.13,2603.35 R88.1
NetLD36_2: LD36.2 Q13.3 | length 149.6
  Top Layer w30: Q13.3 LD36.2
NetLD37_1: LD37.1 R90.1 | length 377.5
  Top Layer w30: LD37.1@9826.14,629.92 9866.5,670.28 9947.83,670.28 10073.82,544.29 R90.1
NetLD37_2: LD37.2 Q16.3 | length 132.9
  Top Layer w30: Q16.3@9654.51,590.55 LD37.2
NetLD38_1: LD38.1 R92.1 | length 117
  Top Layer w30: LD38.1 R92.1
NetLD38_2: LD38.2 Q19.3 | length 196.9
  Top Layer w30: Q19.3@10153.54,2559.06 LD38.2
NetLD39_1: LD39.1 R94.1 | length 376.7
  Top Layer w30: LD39.1 10795.28,669.29 10881.89,669.29 10999.02,552.17 R94.1
NetLD39_2: LD39.2 Q22.3 | length 133.3
  Top Layer w30: Q22.3 10584.63,590.55 LD39.2
NetLD40_1: LD40.1 R96.1 | length 376.4
  Top Layer w30: LD40.1@11684.41,629.92 11684.41,631.24 11715.57,662.4 11826.77,662.4 11925.2,563.98 R96.1
NetLD40_2: LD40.2 Q25.3 | length 140.8
  Top Layer w30: Q25.3 LD40.2
NetLD41_1: LD41.1 R98.1 | length 117.4
  Top Layer w30: LD41.1 12052.17,2599.41 R98.1
NetLD41_2: LD41.2 Q28.3 | length 210
  Top Layer w30: Q28.3@11801.77,2559.06 LD41.2
NetLD42_1: LD42.1 R100.1 | length 369.5
  Top Layer w30: LD42.1@12613.54,629.92 12635.2,651.57 12771.65,651.57 12854.33,568.9 R100.1
NetLD42_2: LD42.2 Q30.3 | length 137.2
  Top Layer w30: Q30.3 12438.96,590.55 12574.17,590.55 LD42.2
NetLD43_1: LD43.1 R102.1 | length 117
  Top Layer w30: LD43.1 R102.1
NetLD43_2: LD43.2 Q32.3 | length 192.9
  Top Layer w30: Q32.3 LD43.2
NetLD44_1: LD44.1 R104.1 | length 382.1
  Top Layer w30: LD44.1@13542.68,629.92 13573.19,660.43 13703.74,660.43 13779.53,584.65 R104.1
NetLD44_2: LD44.2 Q34.3 | length 95.9
  Top Layer w30: Q34.3 13409.44,590.55 LD44.2
NetLD45_1: LD45.1 R106.1 | length 337.4
  Top Layer w30: LD45.1@14471.81,629.92 14495.43,653.54 14595.47,653.54 14677.17,571.85 R106.1
NetLD45_2: LD45.2 Q36.3 | length 130.3
  Top Layer w30: Q36.3 14304.12,590.55 14432.44,590.55 LD45.2
NetLD46_1: LD46.1 R108.1 | length 117.8
  Top Layer w30: LD46.1 14838.58,2713.45 R108.1
NetLD46_2: LD46.2 Q2.3 | length 182.4
  Top Layer w30: Q2.3@14616.77,2559.06 Q2.3 LD46.2
NetLD47_1: LD47.1 R110.1 | length 381.2
  Top Layer w30: LD47.1 15440.94,669.29 15551.18,669.29 15626.97,593.5 R110.1
NetLD47_2: LD47.2 Q4.3 | length 138.8
  Top Layer w30: Q4.3 LD47.2
NetLD48_1: LD48.1 R112.1 | length 117.4
  Top Layer w30: R112.1 15865.16,2599.41 LD48.1
NetLD48_2: LD48.2 Q6.3 | length 180
  Top Layer w30: Q6.3@15646.77,2559.06 LD48.2
NetLD49_1: LD49.1 R114.1 | length 368.3
  Top Layer w30: LD49.1 16362.2,661.42 16492.13,661.42 16535,618.54 R114.1
NetLD49_2: LD49.2 Q8.3 | length 138.8
  Top Layer w30: Q8.3 LD49.2
NetLD50_1: LD50.1 R116.1 | length 119.4
  Top Layer w30: LD50.1 16893.7,2709.52 R116.1
NetLD50_2: LD50.2 Q11.3 | length 185.1
  Top Layer w30: Q11.3 LD50.2
NetLD51_1: LD51.1 R118.1 | length 358.8
  Top Layer w30: LD51.1 17259.84,632.87 17295.28,668.31 17384.84,668.31 17465,588.15 R118.1
NetLD51_2: LD51.2 Q14.3 | length 136.8
  Top Layer w30: Q14.3@17083.65,590.55 LD51.2
NetLD52_1: LD52.1 R120.1 | length 419.7
  Top Layer w30: LD52.1 18244.09,685.04 18362.2,685.04 18420,627.24 R120.1
NetLD52_2: LD52.2 Q17.3 | length 156.5
  Top Layer w30: Q17.3 LD52.2
NetLD53_1: LD53.1 R122.1 | length 118.6
  Top Layer w30: LD53.1 18555.12,2711.48 R122.1
NetLD53_2: LD53.2 Q20.3 | length 351.6
  Top Layer w30: Q20.3@18164.17,2559.06 LD53.2
NetLD54_1: LD54.1 R124.1 | length 253.5
  Top Layer w30: R124.1 19175.2,380.7 19175.2,572.83 LD54.1
NetLD54_2: LD54.2 Q23.3 | length 238
  Top Layer w30: Q23.3 18973.41,629.92 LD54.2
NetLD55_1: LD55.1 R126.1 | length 117
  Top Layer w30: LD55.1 R126.1
NetLD55_2: LD55.2 Q26.3 | length 221.5
  Top Layer w30: Q26.3 LD55.2
NetQ1_1: Q1.1 R79.1 | length 178.2
  Top Layer w10: R79.1 R79.1@6196,2596.46
  Top Layer w20: R79.1@6196,2596.46 Q1.1
NetQ2_1: Q2.1 R109.1 | length 190
  Top Layer w30: R109.1 14329.86,2596.46 Q2.1
NetQ3_1: Q3.1 R81.1 | length 133.9
  Top Layer w10: Q3.1 Q3.1 R81.1
NetQ4_1: Q4.1 R111.1 | length 120.1
  Top Layer w10: Q4.1 15125.13,628.07 R111.1
NetQ5_1: Q5.1 R83.1 | length 144.1
  Top Layer w10: Q5.1 7641.86,629.01 R83.1
NetQ6_1: Q6.1 R113.1 | length 169.7
  Top Layer w12: R113.1 15558.21,2594.62 Q6.1
NetQ7_1: Q7.1 R85.1 | length 156.9
  Top Layer w30: R85.1 7883.73,2596.46 Q7.1
NetQ8_1: Q8.1 R115.1 | length 120.1
  Top Layer w30: Q8.1 16054.15,747.91 R115.1
NetQ9_1: Q9.1 R57.1 | length 112.4
  Top Layer w30: Q9.1 702.64,855.3 R57.1
NetQ10_1: Q10.1 R87.1 | length 135.7
  Top Layer w10: Q10.1@8565.09,628.11 R87.1
NetQ11_1: Q11.1 R117.1 | length 220.5
  Top Layer w12: R117.1 16350.53,2596.46 Q11.1
NetQ12_1: Q12.1 R59.1 | length 122.7
  Top Layer w10: R59.1 1092.65,580.71 Q12.1
NetQ13_1: Q13.1 R89.1 | length 176.5
  Top Layer w30: R89.1 8899.47,2596.46 Q13.1
NetQ14_1: Q14.1 R119.1 | length 120.1
  Top Layer w12: Q14.1 16984.26,747.91 R119.1
NetQ15_1: Q15.1 R61.1 | length 119.6
  Top Layer w30: R61.1 1440.09,2595.47 Q15.1
NetQ16_1: Q16.1 R91.1 | length 263.8
  Top Layer w20: 9555.13,743.1 Q16.1 9555.25,629.05 R91.1
NetQ17_1: Q17.1 R121.1 | length 120.1
  Top Layer w12: Q17.1 17894.7,747.91 R121.1
NetQ18_1: Q18.1 R63.1 | length 175.4
  Top Layer w20: Q18.1 R63.1@2048.24,751.1
  Top Layer w30: R63.1 R63.1@2048.24,751.1
NetQ19_1: Q19.1 R93.1 | length 181.2
  Top Layer w10: R93.1 10066.81,2596.59 Q19.1
NetQ20_1: Q20.1 R123.1 | length 186.5
  Top Layer w30: R123.1 17885.96,2595.47 Q20.1
NetQ21_1: Q21.1 R65.1 | length 153.2
  Top Layer w30: R65.1 2271.96,2596.46 Q21.1
NetQ22_1: Q22.1 R95.1 | length 136.9
  Top Layer w20: Q22.1 10485.25,765.63 R95.1
NetQ23_1: Q23.1 R125.1 | length 114.2
  Top Layer w12: R125.1 18809.07,715.41 Q23.1
NetQ24_1: Q24.1 R67.1 | length 190
  Top Layer w30: Q24.1 3052.18,671.27 3073.69,692.78 R67.1
NetQ25_1: Q25.1 R97.1 | length 122.1
  Top Layer w30: R97.1 11406.51,743.23 Q25.1
NetQ26_1: Q26.1 R127.1 | length 171.3
  Top Layer w10: R127.1 19321.73,2596.59 Q26.1
NetQ27_1: Q27.1 R69.1 | length 174.3
  Top Layer w20: R69.1 3404.66,2596.46 Q27.1
NetQ28_1: Q28.1 R99.1 | length 160.5
  Top Layer w10: R99.1 11720.35,2596.59 Q28.1
NetQ29_1: Q29.1 R71.1 | length 126.4
  Top Layer w30: R71.1 3895.68,662.4 Q29.1
NetQ30_1: Q30.1 R101.1 | length 121.9
  Top Layer w30: Q30.1 12341.67,629.05 R101.1
NetQ31_1: Q31.1 R73.1 | length 133.4
  Top Layer w30: R73.1 4771.59,650.66 4811.09,650.66 4833.79,627.95 Q31.1
NetQ32_1: Q32.1 R103.1 | length 231.8
  Top Layer w30: R103.1 12616.27,2596.46 Q32.1
NetQ33_1: Q33.1 R75.1 | length 213.6
  Top Layer w10: R75.1 5045.41,2596.46 Q33.1
NetQ34_1: Q34.1 R105.1 | length 121.1
  Top Layer w30: Q34.1 13310.17,627.08 R105.1
NetQ35_1: Q35.1 R77.1 | length 137
  Top Layer w10: R77.1 5756.04,630.79 Q35.1
NetQ36_1: Q36.1 R107.1 | length 121.1
  Top Layer w30: Q36.1 14204.85,627.08 R107.1
VCC2.5: C29.1 C30.2 P3.3 P3.4 P12.1 P12.2 R56.2 R58.2 R60.2 R62.2 R64.2 R66.2 R68.2 R70.2 R72.2 R74.2 R76.2 R78.2 R80.2 R82.2 R84.2 R86.2 R88.2 R90.2 R92.2 R94.2 R96.2 R98.2 R100.2 R102.2 R104.2 R106.2 R108.2 R110.2 R112.2 R114.2 R116.2 R118.2 R120.2 R122.2 R124.2 R126.2 | length 44302.7
  Top Layer w30: P3.3 P3.4 246.65,390.75 C29.1@439.75,390.75 ; C29.1@460,390.5 840,390.5 ; R56.2@746.06,388.65 747.91,390.5 840,390.5 ; 9110,390.5 R82.2@8175,390.5 ; 10010,390.5 R82.2@8175,390.5 ; R104.2@13755,390.5 R100.2@12830,390.5 ; C30.2 19112.33,743.96 19315.75,540.55 P12.2 ; R124.2 19035,390.5 R100.2@12830,390.5 ; 840,390.5 R82.2@8175,390.5 ; R82.2@8175,390.5 R100.2@12830,390.5
  Top Layer w80: 840,390.5 840,2655 1017.68,2832.68 19666.34,2832.68
pads on no net: LD20. LD21. LD22. LD23. LD24. LD25. LD26. LD27. LD28. LD29. LD30. LD31. LD32. LD33. LD34. LD35. LD36. LD37. LD38. LD39. LD40. LD41. LD42. LD43. LD44. LD45. LD46. LD47. LD48. LD49. LD50. LD51. LD52. LD53. LD54. LD55. P11.3 P11.5 P11.7 P11.9 Q18.2

## Polygon pours and split planes (outlines as drawn)
VCC2.5 on Top Layer "VCC2.5" (solid, remove dead copper, pour order 0): 295.28,576.77 327.76,544.29 327.76,431.1 19229.33,431.1 19260.83,462.6 19260.83,568.9 19276.57,584.65 19383.86,584.65 19412.4,556.1 19412.4,287.4 19281.5,156.5 210.63,156.5 73.82,293.31 73.82,561.02 89.57,576.77
GND on Bottom Layer "GND" (solid, remove dead copper, pour order 2): 562.01,3149.61 20074.8,3149.61 20074.8,1574.8 19511.81,1574.8 19511.81,0 -2.95,0 -6.89,3.94 0,10.83 0,1574.8 555.12,1574.8

## Keep-outs
Keep-Out Layer:
  the board outline again, w10

## Other copper
Top Layer:
  rectangle net GND: 2614.17,671.26 2907.48,839.57
  rectangle net GND: 18275.59,725.39 18657.48,852.36
  rectangle net GND: 18530.51,2297.24 18898.62,2414.37
Bottom Layer:
  pour cut-out: 19228.35,595.47 19494.02,595.47 19496.52,592.98 19496.52,345.02 19497.05,344.49 19195.87,344.49 19225.39,345.02 19225.39,375.98 19225.39,598.43
  pour cut-out: 37.4,590.55 295.28,590.55 304.13,581.69 304.13,355.32 293.31,344.49 19.68,344.49 17.72,346.46 17.72,583.66 21.65,587.6

## Silkscreen, mask and mechanical layers (free items; w line width, h text height)
Top Overlay:
  text "LASER_DRIVER_BOARD_02" at 7007.4,1562.44 h60

## Text inside footprints (layer, text, board x,y; h text height)
LD20: Bottom Overlay "+" at 550.43,655.55 h60; Bottom Overlay "PD" at 635.43,575.55 h31.5; Bottom Overlay "-" at 460.43,575.55 h60
LD21: Bottom Overlay "-" at 1389.57,575.55 h60; Bottom Overlay "PD" at 1564.57,575.55 h31.5; Bottom Overlay "+" at 1479.57,655.55 h60
LD22: Bottom Overlay "-" at 1755.71,2544.06 h60; Bottom Overlay "PD" at 1930.71,2544.06 h31.5; Bottom Overlay "+" at 1845.71,2624.06 h60
LD23: Bottom Overlay "+" at 2408.7,655.55 h60; Bottom Overlay "PD" at 2493.7,575.55 h31.5; Bottom Overlay "-" at 2318.7,575.55 h60
LD24: Bottom Overlay "+" at 2873.27,2624.06 h60; Bottom Overlay "PD" at 2958.27,2544.06 h31.5; Bottom Overlay "-" at 2783.27,2544.06 h60
LD25: Bottom Overlay "-" at 3247.83,575.55 h60; Bottom Overlay "PD" at 3422.83,575.55 h31.5; Bottom Overlay "+" at 3337.83,655.55 h60
LD26: Bottom Overlay "+" at 3900.83,2624.06 h60; Bottom Overlay "PD" at 3985.83,2544.06 h31.5; Bottom Overlay "-" at 3810.83,2544.06 h60
LD27: Bottom Overlay "+" at 4266.97,655.55 h60; Bottom Overlay "PD" at 4351.97,575.55 h31.5; Bottom Overlay "-" at 4176.97,575.55 h60
LD28: Bottom Overlay "-" at 5106.1,575.55 h60; Bottom Overlay "PD" at 5281.1,575.55 h31.5; Bottom Overlay "+" at 5196.1,655.55 h60
LD29: Bottom Overlay "-" at 5472.24,2544.06 h60; Bottom Overlay "PD" at 5647.24,2544.06 h31.5; Bottom Overlay "+" at 5562.24,2624.06 h60
LD30: Bottom Overlay "+" at 6125.24,655.55 h60; Bottom Overlay "PD" at 6210.24,575.55 h31.5; Bottom Overlay "-" at 6035.24,575.55 h60
LD31: Bottom Overlay "+" at 6688.23,2624.06 h60; Bottom Overlay "PD" at 6773.23,2544.06 h31.5; Bottom Overlay "-" at 6598.23,2544.06 h60
LD32: Bottom Overlay "-" at 6964.37,575.55 h60; Bottom Overlay "PD" at 7139.37,575.55 h31.5; Bottom Overlay "+" at 7054.37,655.55 h60
LD33: Bottom Overlay "+" at 7983.5,655.55 h60; Bottom Overlay "PD" at 8068.5,575.55 h31.5; Bottom Overlay "-" at 7893.5,575.55 h60
LD34: Bottom Overlay "-" at 8259.65,2544.06 h60; Bottom Overlay "PD" at 8434.65,2544.06 h31.5; Bottom Overlay "+" at 8349.65,2624.06 h60
LD35: Bottom Overlay "-" at 8822.64,575.55 h60; Bottom Overlay "PD" at 8997.64,575.55 h31.5; Bottom Overlay "+" at 8912.64,655.55 h60
LD36: Bottom Overlay "-" at 9287.2,2544.06 h60; Bottom Overlay "PD" at 9462.2,2544.06 h31.5; Bottom Overlay "+" at 9377.2,2624.06 h60
LD37: Bottom Overlay "+" at 9841.77,655.55 h60; Bottom Overlay "PD" at 9926.77,575.55 h31.5; Bottom Overlay "-" at 9751.77,575.55 h60
LD38: Bottom Overlay "+" at 10404.76,2624.06 h60; Bottom Overlay "PD" at 10489.76,2544.06 h31.5; Bottom Overlay "-" at 10314.76,2544.06 h60
LD39: Bottom Overlay "-" at 10680.91,575.55 h60; Bottom Overlay "PD" at 10855.91,575.55 h31.5; Bottom Overlay "+" at 10770.91,655.55 h60
LD40: Bottom Overlay "+" at 11700.04,655.55 h60; Bottom Overlay "PD" at 11785.04,575.55 h31.5; Bottom Overlay "-" at 11610.04,575.55 h60
LD41: Bottom Overlay "+" at 12066.18,2624.06 h60; Bottom Overlay "PD" at 12151.18,2544.06 h31.5; Bottom Overlay "-" at 11976.18,2544.06 h60
LD42: Bottom Overlay "-" at 12539.17,575.55 h60; Bottom Overlay "PD" at 12714.17,575.55 h31.5; Bottom Overlay "+" at 12629.17,655.55 h60
LD43: Bottom Overlay "-" at 13102.17,2544.06 h60; Bottom Overlay "PD" at 13277.17,2544.06 h31.5; Bottom Overlay "+" at 13192.17,2624.06 h60
LD44: Bottom Overlay "+" at 13558.31,655.55 h60; Bottom Overlay "PD" at 13643.31,575.55 h31.5; Bottom Overlay "-" at 13468.31,575.55 h60
LD45: Bottom Overlay "-" at 14397.44,575.55 h60; Bottom Overlay "PD" at 14572.44,575.55 h31.5; Bottom Overlay "+" at 14487.44,655.55 h60
LD46: Bottom Overlay "+" at 14853.58,2624.06 h60; Bottom Overlay "PD" at 14938.58,2544.06 h31.5; Bottom Overlay "-" at 14763.58,2544.06 h60
LD47: Bottom Overlay "-" at 15326.57,575.55 h60; Bottom Overlay "PD" at 15501.57,575.55 h31.5; Bottom Overlay "+" at 15416.57,655.55 h60
LD48: Bottom Overlay "-" at 15791.14,2544.06 h60; Bottom Overlay "PD" at 15966.14,2544.06 h31.5; Bottom Overlay "+" at 15881.14,2624.06 h60
LD49: Bottom Overlay "+" at 16345.71,655.55 h60; Bottom Overlay "PD" at 16430.71,575.55 h31.5; Bottom Overlay "-" at 16255.71,575.55 h60
LD50: Bottom Overlay "+" at 16908.7,2624.06 h60; Bottom Overlay "PD" at 16993.7,2544.06 h31.5; Bottom Overlay "-" at 16818.7,2544.06 h60
LD51: Bottom Overlay "-" at 17184.84,575.55 h60; Bottom Overlay "PD" at 17359.84,575.55 h31.5; Bottom Overlay "+" at 17274.84,655.55 h60
LD52: Bottom Overlay "+" at 18203.98,655.55 h60; Bottom Overlay "PD" at 18288.98,575.55 h31.5; Bottom Overlay "-" at 18113.98,575.55 h60
LD53: Bottom Overlay "-" at 18480.12,2544.06 h60; Bottom Overlay "PD" at 18655.12,2544.06 h31.5; Bottom Overlay "+" at 18570.12,2624.06 h60
LD54: Bottom Overlay "-" at 19103.11,665.55 h60 r270; Bottom Overlay "PD" at 19103.11,490.55 h31.5 r270; Bottom Overlay "+" at 19183.11,575.55 h60 r270
LD55: Bottom Overlay "+" at 19696.1,2624.06 h60; Bottom Overlay "PD" at 19781.1,2544.06 h31.5; Bottom Overlay "-" at 19606.1,2544.06 h60
P9: Top Overlay "1" at 933.07,2358.27 h39.37 r270; Top Overlay "2" at 1354.33,2366.14 h39.37 r270; Top Overlay "40" at 1342.52,803.15 h39.37 r270; Top Overlay "39" at 933.07,795.28 h39.37 r270
P10: Top Overlay "39" at 3003.94,2354.33 h39.37 r90; Top Overlay "40" at 2594.49,2346.46 h39.37 r90; Top Overlay "2" at 2582.68,783.46 h39.37 r90; Top Overlay "1" at 3003.94,791.34 h39.37 r90
P11: Top Overlay "1" at 18751.97,791.34 h39.37 r90; Top Overlay "2" at 18330.71,783.46 h39.37 r90; Top Overlay "40" at 18342.52,2346.46 h39.37 r90; Top Overlay "39" at 18751.97,2354.33 h39.37 r90